# EAGLE board opc3BC (EAGLE 9.5.2)
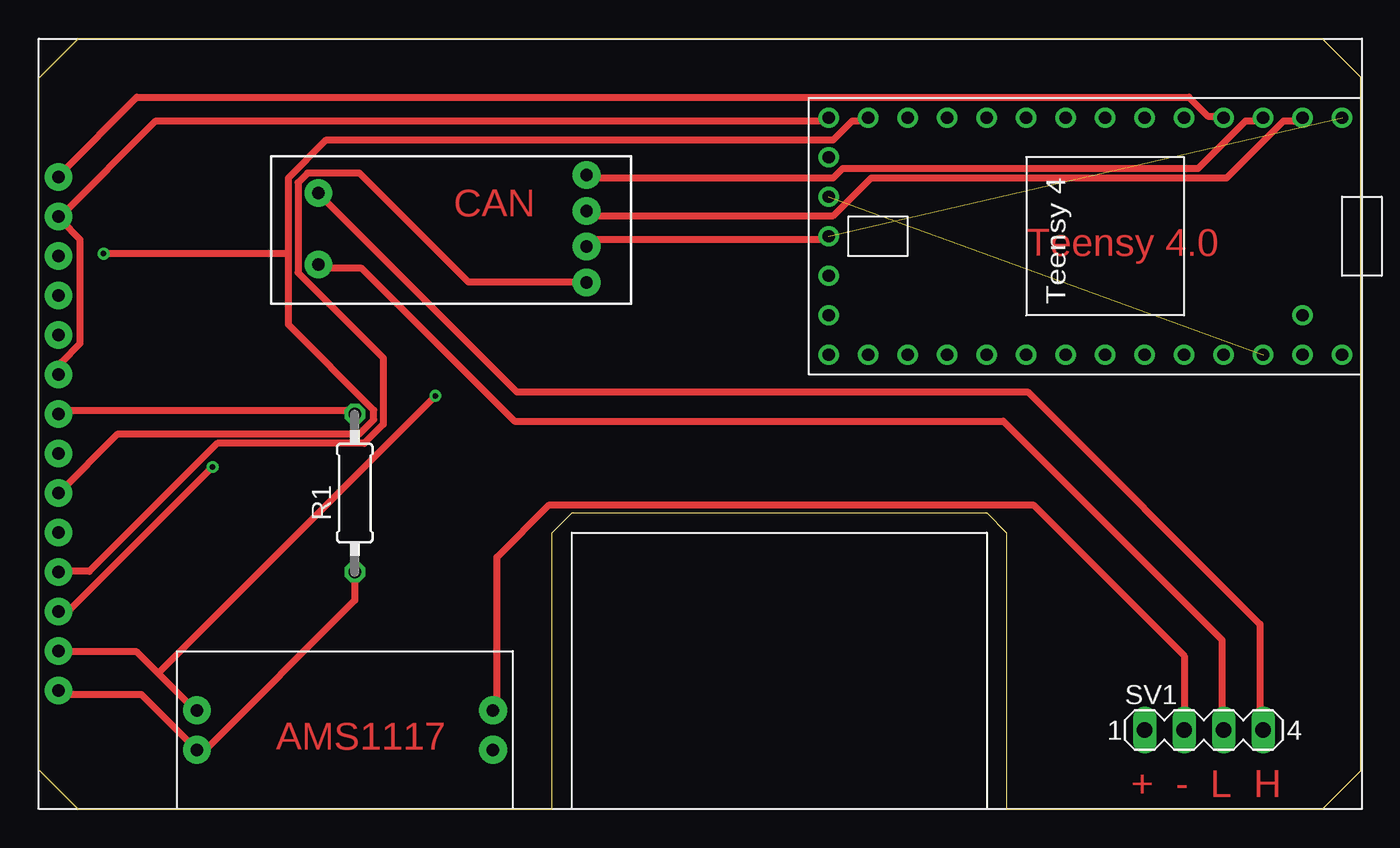
[diagram p0: board, top side]
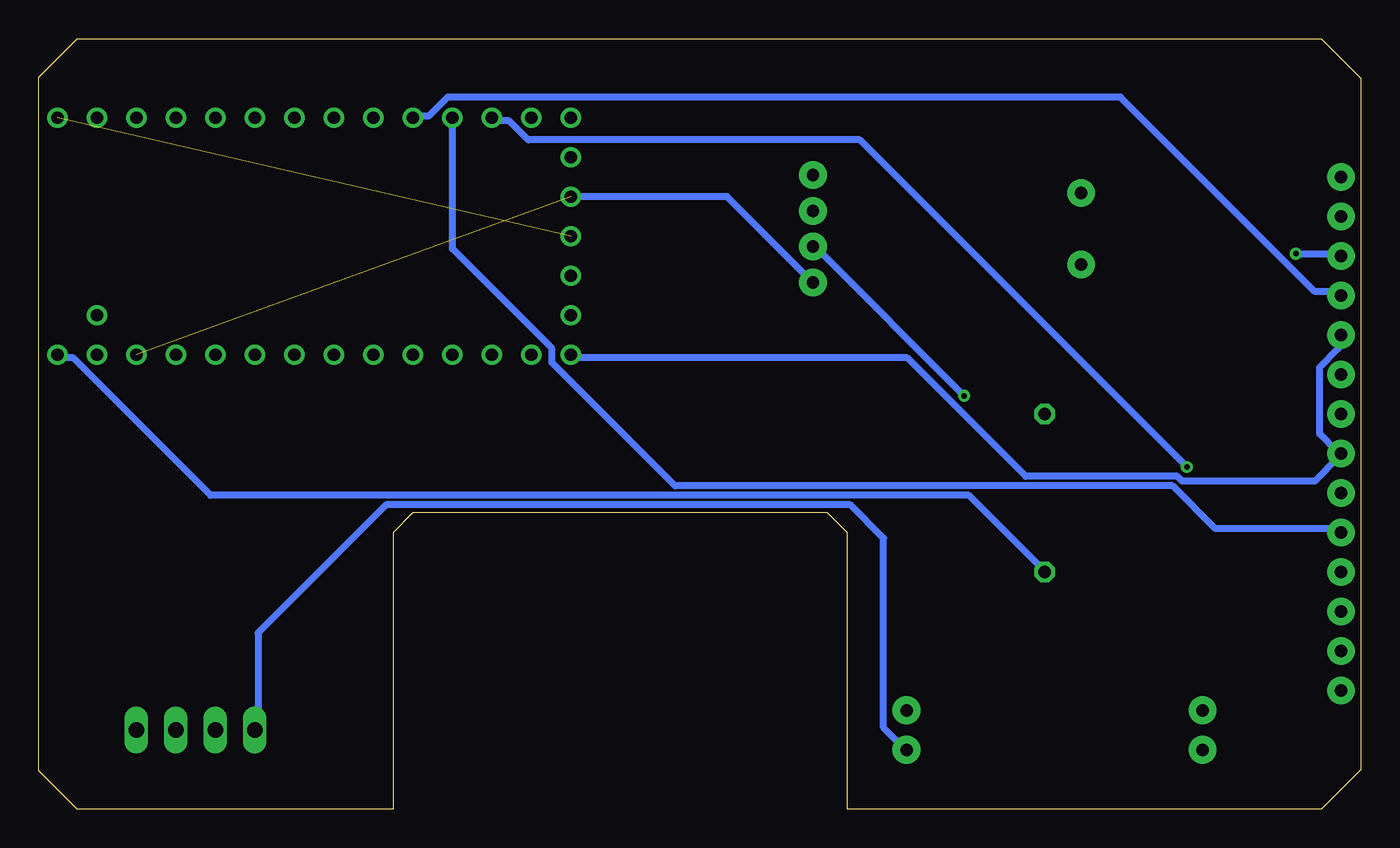
[diagram p1: board, bottom side, seen from below]

Size 85.01 x 49.52 mm. Coordinates in mm from the lower left corner, seen from the top.
Outline: 82.56,49.52 2.53,49.52 0,46.99 0,2.54 2.54,0 33.02,0 33.02,17.78 34.29,19.05 60.96,19.05 62.23,17.78 62.23,0 82.55,0 85.01,2.46 85.01,47.07 82.56,49.52
Copper layers (1*16): Top 0.035mm / dielectric 1.5mm / Bottom 0.035mm
Design rules "default *": minimum track width 18mil, minimum drill 0.35mm, track to track 10mil, track to pad 10mil, pad to pad 6mil, via to via 6mil, smd to smd 6mil, copper to edge 20mil, drill to drill 6mil, minimum pad ring 10mil, minimum via ring 8mil, stop-mask expansion 4mil, vias tented up to drill 0mil, thermal gap 10mil

## Footprints (pad centres in the part's own frame; a part is rotated, then mirrored left to right if it is on the bottom)
FP = drill 0.8 pad 1.778: GND 1.27,3.81; GNDOUT 20.32,3.81; VIN 1.27,6.35; VOUT 20.32,6.35
0207/10 = drill 0.813 octagon: 1 -5.08,0; 2 5.08,0
MA04-1 = drill 1.016 long: 1 -3.81,0; 2 -1.27,0; 3 1.27,0; 4 3.81,0
TEENSY4.0 = drill 0.8: 3.3V@1 7.62,10.16; 3.3V@2 -2.54,-17.78; AGND 7.62,12.7; D0 -7.62,12.7; D1 -7.62,10.16; D2 -7.62,7.62; D3 -7.62,5.08; D4 -7.62,2.54; D5 -7.62,0; D6 -7.62,-2.54; D7 -7.62,-5.08; D8 -7.62,-7.62; D9 -7.62,-10.16; D10 -7.62,-12.7; D11 -7.62,-15.24; D12 -7.62,-17.78; D13/LED 7.62,-17.78; D14/A0 7.62,-15.24; D15/A1 7.62,-12.7; D16/A2 7.62,-10.16; D17/A3 7.62,-7.62; D18/A4 7.62,-5.08; D19/A5 7.62,-2.54; D20/A6 7.62,0; D21/A7 7.62,2.54; D22/A8 7.62,5.08; D23/A9 7.62,7.62; GND@1 -7.62,15.24; GND@2 0,-17.78; ON/OFF 5.08,-17.78; PROGRAM 2.54,-17.78; VBAT -5.08,-17.78; VIN 7.62,15.24; VUSB 5.08,12.7
ILI9341_FP = drill 0.8 pad 1.778: CS 1.27,12.7; DC 1.27,17.78; GND 1.27,10.16; LED 1.27,25.4; RESET 1.27,15.24; SCK 1.27,22.86; SDI 1.27,20.32; SDO 1.27,27.94; T_CLK 1.27,30.48; T_CS 1.27,33.02; T_DIN 1.27,35.56; T_DO 1.27,38.1; T_IRQ 1.27,40.64; VCC 1.27,7.62
CAN_BOARD = drill 0.8 pad 1.778: 3.3V 2.875,8.05; CANH 20.125,2.3; CANL 20.125,6.9; GND 2.875,5.75; RX 2.875,3.45; TX 2.875,1.15

## Placement (x,y rotation side)
DC/DC  DEV  [FP]  30.48,10.16 180 top
R1  100  [0207/10]  20.32,20.32 90 top
SV1  + - L H  [MA04-1]  74.93,5.08 0 top
U$1  TEENSY4.0  [TEENSY4.0]  68.58,36.83 270 top
U$2  ILI9341  [ILI9341_FP]  0,0 0 top
U$3  CAN_MODULE  [CAN_BOARD]  38.1,41.91 180 top

## Library data of the parts
DC/DC = AMS1117_5V
R1 = rcl; SPICEPREFIX: R
SV1 = con-lstb; OC_FARNELL: unknown; OC_NEWARK: unknown
U$1 = Teensy4.0
U$2 = TFT_ILI9341_TOUCH
U$3 = waveshare_can

## Nets
GND: DC/DC.GNDOUT U$1.GND@1 U$1.GND@2 U$2.GND U$3.GND
N$1: DC/DC.VOUT R1.1 U$1.VIN U$2.VCC
N$2: R1.2 U$2.LED
N$3: U$1.D11 U$2.SDI U$2.T_DIN
N$4: U$1.D0 U$3.RX
N$5: U$1.D1 U$3.TX
N$6: SV1.4 U$3.CANH
N$7: U$1.3.3V@1 U$1.3.3V@2 U$2.RESET U$3.3.3V
N$8: U$1.D12 U$2.SDO U$2.T_DO
N$9: U$1.D9 U$2.DC
N$10: U$1.D10 U$2.CS
N$11: U$1.D13/LED U$2.SCK U$2.T_CLK
N$12: U$1.D8 U$2.T_CS
N$13: SV1.3 U$3.CANL
N$14: DC/DC.VIN SV1.1
N$15: DC/DC.GND SV1.2
N$16: U$1.D2 U$2.T_IRQ

## Tracks (layer width: path | path; a pad name or v marks a point on that pad's centre or on a via)
GND  (via drill 0.35)  (1 unrouted)
  Top 0.457: 7.67,8.74 9.96,6.45 DC/DC.GNDOUT | 7.67,8.74 6.3,10.11 1.42,10.11 U$2.GND | U$1.GND@2 50.8,36.63 35.56,36.63 35.25,36.32 U$3.GND | v25.5,26.57 7.67,8.74
  Bottom 0.457: v25.5,26.57 34.95,36.02 U$3.GND
N$1
  Top 0.457: U$2.VCC 1.42,7.37 6.6,7.37 DC/DC.VOUT 10.72,3.81 20.32,13.41 R1.1
  Bottom 0.457: U$1.VIN 83.72,29.01 82.8,29.01 73.97,20.17 25.2,20.17 20.32,15.29 R1.1
N$2
  Top 0.457: R1.2 20.32,25.65 1.42,25.65 U$2.LED
N$3  (via drill 0.35)
  Top 0.457: 16.05,35.71 16.05,31.14 21.54,25.65 21.54,25.04 20.62,24.13 5.08,24.13 U$2.SDI | 16.05,35.71 16.05,40.59 18.49,43.03 51.11,43.03 52.32,44.25 53.24,44.25 U$1.D11 | 16.05,35.71 v4.17,35.71
  Bottom 0.457: v4.17,35.71 1.42,35.71 U$2.T_DIN
N$4
  Top 0.457: U$1.D0 81.28,44.25 80.06,44.25 76.4,40.59 53.54,40.59 51.11,38.15 35.56,38.15 35.25,38.46 U$3.RX
N$5
  Top 0.457: U$1.D1 78.54,44.25 77.62,44.25 74.57,41.2 51.71,41.2 51.11,40.59 35.25,40.59 U$3.TX
N$6
  Top 0.457: SV1.4 78.54,5.28 78.54,11.89 63.6,26.82 30.73,26.82 18.19,39.37 U$3.CANH
N$7  (1 unrouted)
  Top 0.457: U$2.RESET 1.42,15.29 3.25,15.29 11.48,23.52 20.93,23.52 22.15,24.74 22.15,29.01 16.66,34.49 16.66,40.28 17.27,40.89 20.62,40.89 27.64,33.88 34.95,33.88 U$3.3.3V
  Bottom 0.457: U$1.3.3V@2 40.74,39.37 35.25,33.88 U$3.3.3V
N$8
  Top 0.457: U$1.D12 50.8,44.25 7.52,44.25 1.42,38.15 U$2.T_DO 1.42,37.85 2.64,36.63 2.64,29.92 1.42,28.7 1.42,28.09 U$2.SDO
N$9
  Bottom 0.457: U$1.D9 58.42,36.02 52.02,29.62 52.02,28.7 44.09,20.78 12.09,20.78 9.35,18.03 1.42,18.03 U$2.DC
N$10  (via drill 0.35)
  Top 0.457: v11.18,22 2.03,12.85 1.42,12.85 U$2.CS
  Bottom 0.457: v11.18,22 32.21,43.03 53.54,43.03 54.76,44.25 55.68,44.25 U$1.D10
N$11
  Bottom 0.457: U$1.D13/LED 50.8,29.01 29.16,29.01 21.54,21.39 11.79,21.39 11.48,21.08 2.95,21.08 1.42,22.61 U$2.SCK 1.42,22.91 2.64,24.13 2.64,28.4 1.42,29.62 1.42,30.23 U$2.T_CLK
N$12
  Bottom 0.457: U$1.D8 60.86,44.55 59.94,44.55 58.73,45.77 15.44,45.77 2.95,33.27 1.42,33.27 U$2.T_CS
N$13
  Top 0.457: SV1.3 76.1,5.28 76.1,10.87 62.03,24.94 30.58,24.94 20.73,34.8 18.19,34.8 U$3.CANL
N$14
  Bottom 0.457: SV1.1 70.92,5.28 70.92,11.33 62.69,19.56 32.82,19.56 30.68,17.42 30.68,5.23 29.46,4.01 DC/DC.VIN
N$15
  Top 0.457: SV1.2 73.66,9.85 63.96,19.56 32.82,19.56 29.46,16.2 29.46,6.45 DC/DC.GND
N$16
  Top 0.457: U$1.D2 76.1,44.55 75.18,44.55 73.97,45.77 6.3,45.77 1.42,40.89 U$2.T_IRQ

## Text on the board
Top: CAN | Teensy 4.0 | AMS1117 | + - L H